# Altium PCB power_12V_5V_3V3_V10.PcbDoc
Units mm, origin at the board's own origin, x right, y up, seen from the top; angles counter-clockwise.
Board outline 32.06 x 54.75 mm, 2 copper layers (Top Layer, Bottom Layer); 22 components, 6 nets, 71 pads, 0 vias.
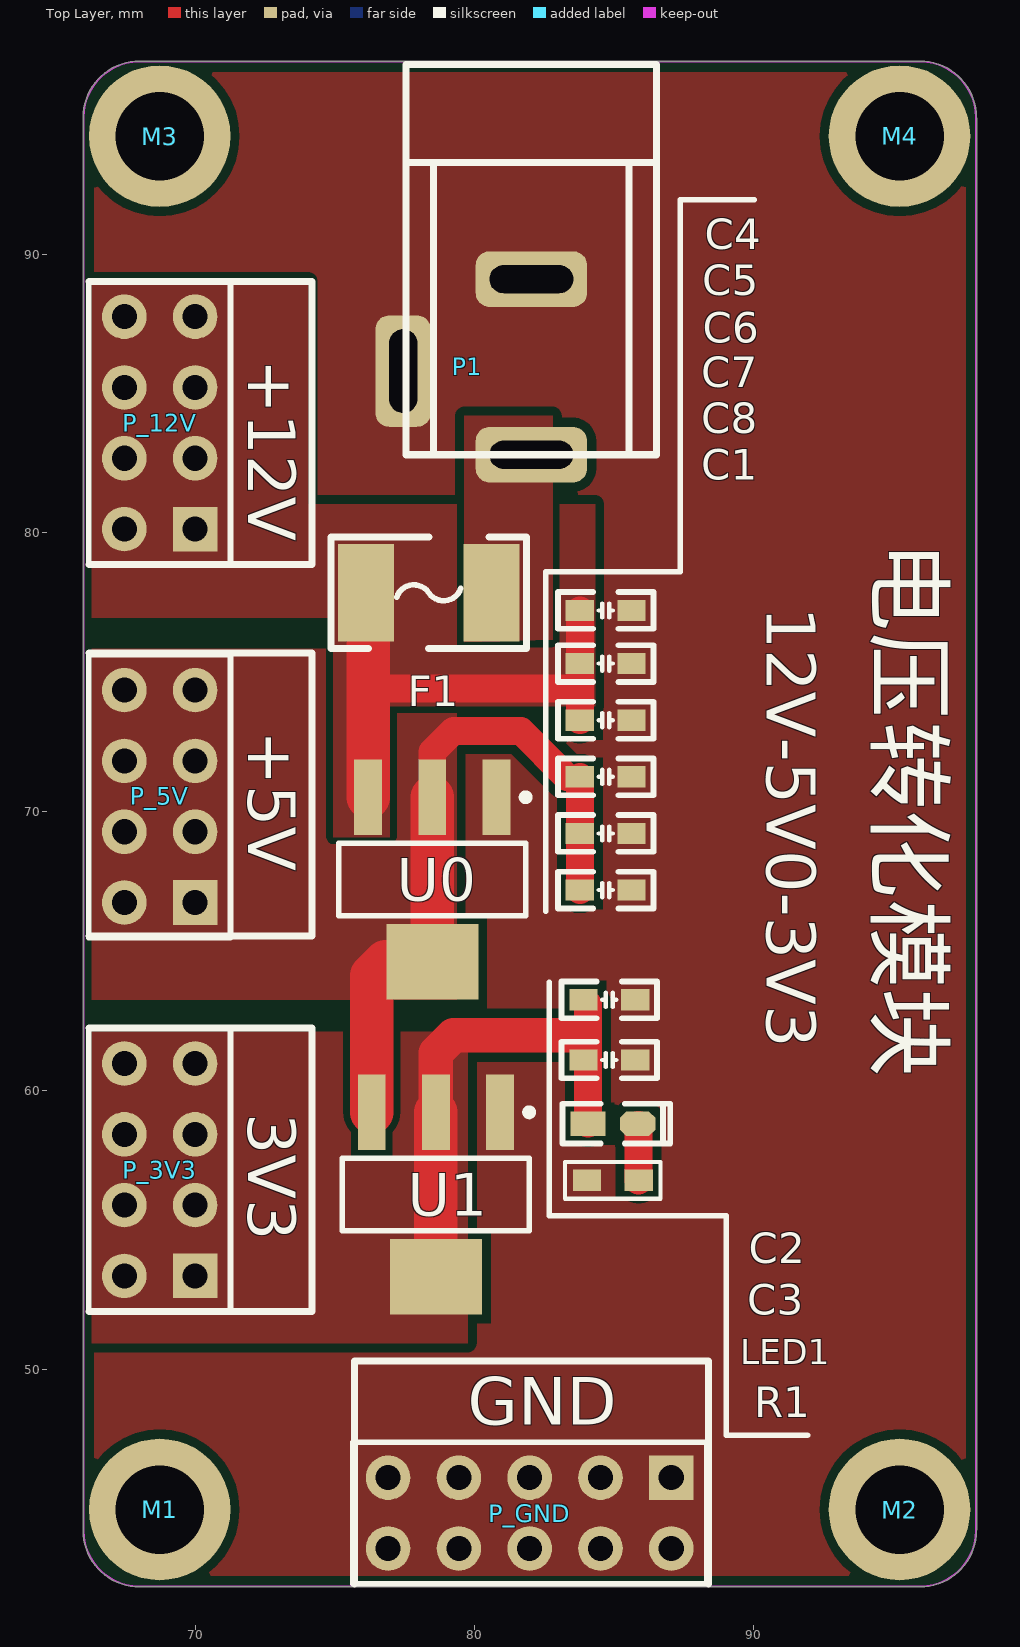
[diagram p0: Top Layer view]
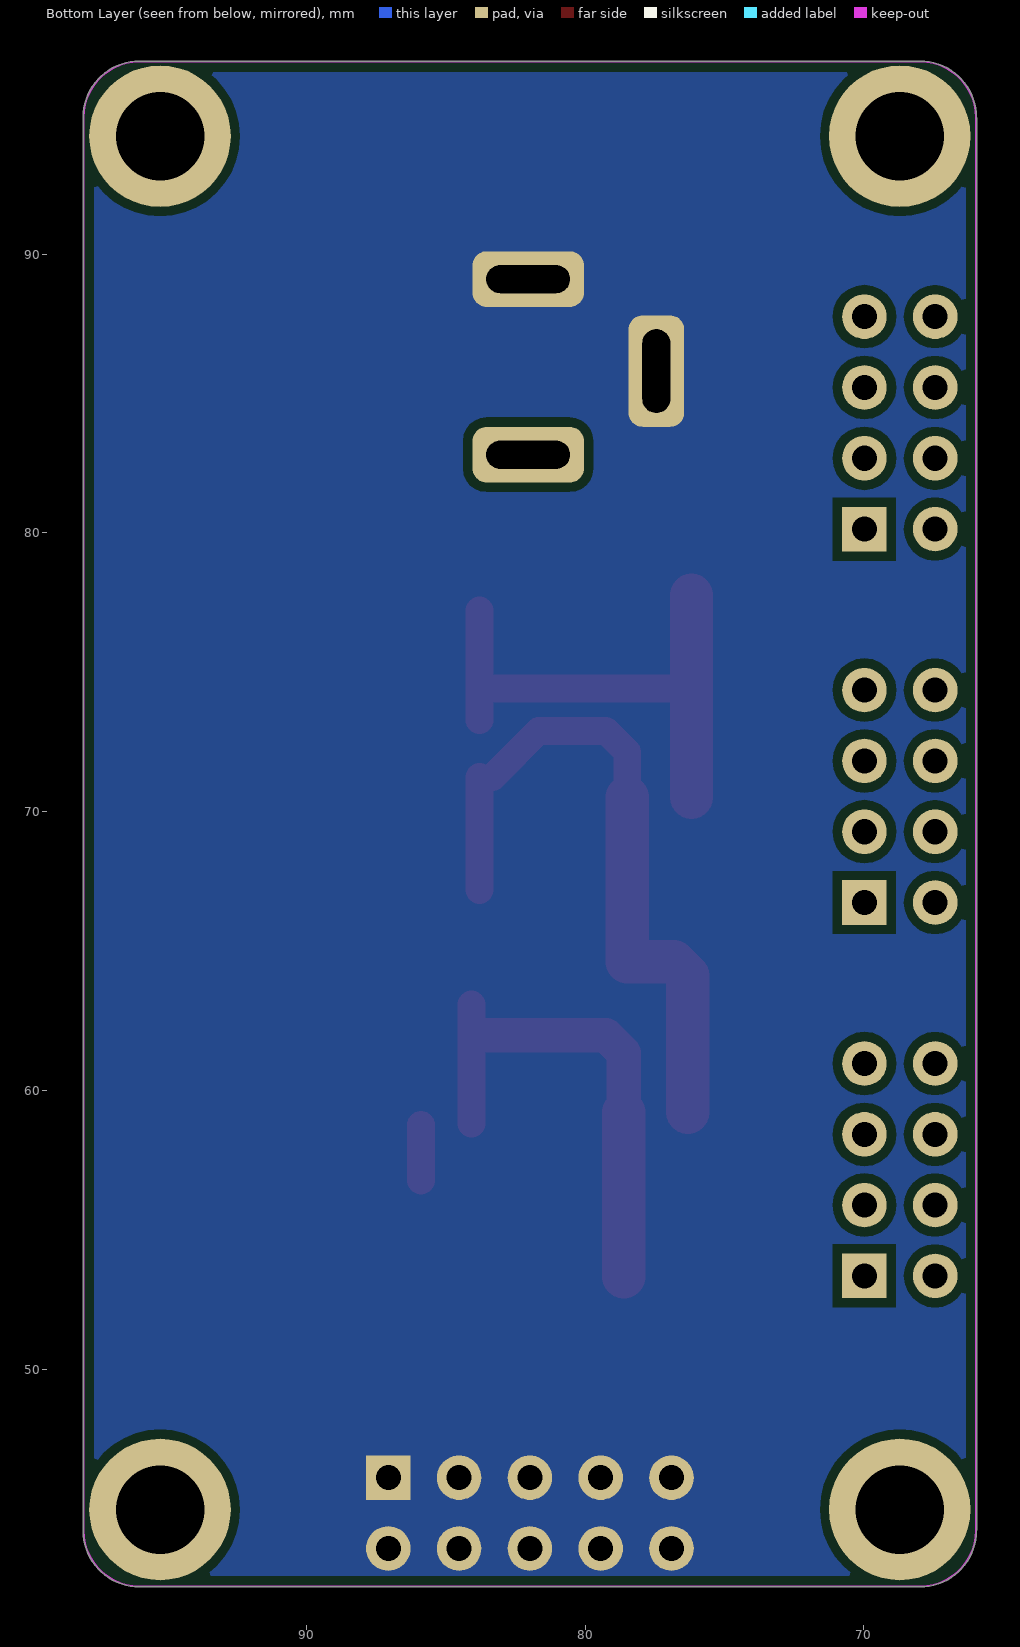
[diagram p1: Bottom Layer view, seen from below]

## Layer stack, top to bottom
Top Solder: solder mask 0.0102, Solder Resist, Dk 3.5
Top Layer: signal copper 0.0356
Dielectric 1: dielectric 0.32, FR-4, Dk 4.8
Bottom Layer: signal copper 0.0356
Bottom Solder: solder mask 0.0102, Solder Resist, Dk 3.5

## Board outline
65.955,44.208 65.955,94.869 cw(c65.984,94.869) 65.96,94.885 cw(c65.984,94.901) 65.955,94.901 cw(c67.984,94.901) 67.984,96.929 cw(c67.984,96.901) 67.984,96.929 95.984,96.929 cw(c95.984,94.901) 98.012,94.901 98.012,44.208 cw(c95.984,44.208) 95.984,42.18 67.984,42.18 cw(c67.984,44.208)

## Design rules (kind name [scope] priority, off if disabled: settings)
Clearance Clearance_2 [InNamedPolygon('GND_L02_P026')] p1: gap=0.33
Clearance Clearance_1 [InNamedPolygon('GND_L01_P025')] p2: gap=0.33
Clearance [All] p3: gap=0.254
PolygonConnect [All] p1: connectstyle=Direct reliefconductorwidth=0.254 reliefentries=4 polygonreliefangle="90 Angle" airgapwidth=0.254
RoutingVias [All] p1: holewidth=0.711 width=1.27 viastyle="Through Hole" minholewidth=0.711 minwidth=1.27 maxholewidth=0.711 maxwidth=1.27
SolderMaskExpansion [All] p1: expansion=0.102
Width [All] p1: maxlimit=10 minlimit=0.254 preferedwidth=0.254
30 further rules are at their usual default settings.

## Components (designator, comment, footprint, x,y, rotation, side; value= is the part's Value field where it differs from the comment)
C1 "Cap" "C 0603_M" 84.709,67.183 r180 top
C2 "Cap" "C 0603_M" 84.836,63.246 r180 top
C3 "Cap" "C 0603_M" 84.836,61.087 r180 top
C4 "Cap" "C 0603_M" 84.709,77.216 r180 top
C5 "Cap" "C 0603_M" 84.709,75.311 r180 top
C6 "Cap" "C 0603_M" 84.709,73.279 r180 top
C7 "Cap" "C 0603_M" 84.709,71.247 r180 top
C8 "Cap" "C 0603_M" 84.709,69.215 r180 top
F1 "Fuse 2" "FU 1812" 78.359,77.851 r180 top
LED1 "5V" "LED 0603Y" 84.963,58.801 r0 top
M1 "M3X10" M3X10_L 68.707,44.958 r0 top locked
M2 "M3X10" M3X10_L 95.25,44.958 r0 top locked
M3 "M3X10" M3X10_L 68.707,94.234 r0 top locked
M4 "M3X10" M3X10_L 95.25,94.234 r0 top locked
P1 "DC_12V" DC-5MM 82.931,82.804 r90 top locked
P_3V3 "Header 4X2" HDR2.54-LI-2x4P 68.707,57.15 r90 top locked
P_5V "Header 4X2" HDR2.54-LI-2x4P 68.707,70.548 r90 top
P_12V "Header 4X2" HDR2.54-LI-2x4P 68.707,83.947 r90 top
P_GND "Header 5X2" HDR2.54-LI-2x5P 81.98,44.831 r180 top locked
R1 "1K" "R 0603-HP_M" 84.963,56.769 r0 top
U0 "AMS1117-5V" SOT223_M 78.486,67.564 r270 top
U1 "AMS1117-3V3" SOT223_M 78.613,56.261 r270 top

## Footprints (in the part's own frame and the unit in brackets; to place one, negate y for a bottom-side part, rotate by r counter-clockwise, add the part's x,y. Pads: shape width x height; smd on the part's side, far side on the other; paste and mask are expansions set on the pad)
"C 0603_M" [mil] "无极性贴片电容"
  rect 40x30 smd: 1(-36.5,0) 2(36.5,0)
  silkscreen extent -68,-26 68,26, body extent -31,-16 31,16, height 32
DC-5MM [mm]
  rrect50% 2x4 hole 1 slot 3 at 90 deg: 1(6.3,0.889) 2(0,0.889)
  rrect50% 4x2 hole 1 slot 3 at 0 deg: 3(3,5.489)
  silkscreen extent 0,-3.61 14,5.38, body extent -0.04,-3.61 13.78,5.89, height 11.02
"FU 1812" [mm] "贴片保险丝"
  rect 2x3.5 smd: 1(-2.25,0) 2(2.25,0)
  silkscreen extent -3.5,-2 3.5,2, body extent -2.3,-1.61 2.3,1.61, height 0.87
HDR2.54-LI-2x4P [mm] "双排排针，4x2脚"
  rect 1.6x1.6 hole 0.9: 1(-3.81,-1.27)
  round 1.6 hole 0.9: 2(-3.81,1.27) 3(-1.27,-1.27) 4(-1.27,1.27) 5(1.27,-1.27) 6(1.27,1.27) 7(3.81,-1.27) 8(3.81,1.27)
  silkscreen extent -5.08,-2.54 5.08,2.54, body extent -5.08,-2.54 5.08,2.54, height 8.5
HDR2.54-LI-2x5P [mm] "双排排针，5x2脚"
  rect 1.6x1.6 hole 0.9: 1(-5.08,-1.27)
  round 1.6 hole 0.9: 2(-5.08,1.27) 3(-2.54,-1.27) 4(-2.54,1.27) 5(0,-1.27) 6(0,1.27) 7(2.54,-1.27) 8(2.54,1.27) 9(5.08,-1.27) 10(5.08,1.27)
  silkscreen extent -6.35,-2.54 6.35,2.54, body extent -6.35,-2.54 6.35,2.54, height 8.5
"LED 0603Y" [mil] "黄色0603LED"
  rect 50x35 smd: 1(-35,0)
  oct 50x35 smd: 2(35,0)
  silkscreen extent -71,-28 81,28, body extent -32,-16 31,16, height 18
M3X10_L [mm] "M3铜柱，长：10mm"
  round 5.08 hole 3.175: 1(0,0)
  body extent -2.7,-2.35 2.7,2.35, height 10.05
"R 0603-HP_M" [mil] "1/10W高精度贴片电阻"
  rect 40x30 smd: 1(-36.5,0) 2(36.5,0)
  silkscreen extent -68,-26 68,26, body extent -31,-16 32,16, height 16
SOT223_M [mm] "SOT223, 4-Leads, Body 6.5x3.5mm, Pitch 2.3mm, Lead Span 7mm, IPC Low Density"
  rect 2.7x1 smd: 1(-2.95,2.3) 2(-2.95,0) 3(-2.95,-2.3)
  rect 2.7x3.3 smd: 4(2.95,0)
  silkscreen extent -3.07,-3.35 1.3,3.48, body extent -1.85,-3.35 1.85,3.35, height 1.7

## Part data
C1 C2 C3 C4 C5 C6 C7 C8: "Capacitor"
F1: "Fuse"
LED1: library part LED2, "Typical RED, GREEN, YELLOW, AMBER GaAs LED"
P1: library part PIN3
P_3V3 P_5V P_12V: "Header, 4-Pin, Dual row"
P_GND: "Header, 5-Pin, Dual row"
R1: library part Res2, "Resistor"
U0 U1: library part ASM1117-3V3

## Nets (pads, with @x,y where several pads share a name; then routed paths per layer and width w, separated by ;. In a path a pad name is that pad's centre, name@x,y a point inside that pad or via, vN(x,y) a via of type N, cw(c..) or ccw(c..) an arc to the next point about the centre after c; other vN are vias at no path point)
+3V3: C2.2 C3.2 LED1.1 P_3V3.1 P_3V3.2 P_3V3.3 P_3V3.4 P_3V3.5 P_3V3.6 P_3V3.7 P_3V3.8 U1.2 U1.4 | length 17.8
  Top Layer w1: LED1.1 C2.2@84.074,63.081
  Top Layer w1.25: U1.2 78.613,61.341 79.248,61.976 83.82,61.976
  Top Layer w1.55: U1.4 U1.2
+5V: C1.2 C7.2 C8.2 P_5V.1 P_5V.2 P_5V.3 P_5V.4 P_5V.5 P_5V.6 P_5V.7 P_5V.8 U0.2 U0.4 U1.3 | length 24.7
  Top Layer w1: U0.2 78.486,72.136 79.248,72.898 81.661,72.898 C7.2@83.312,71.247 ; C1.2 C8.2 C7.2
  Top Layer w1.55: U1.3 76.313,64.121 76.806,64.614 U0.4 U0.2
GND: C1.1 C2.1 C3.1 C4.1 C5.1 C6.1 C7.1 C8.1 P1.1 P1.3 P_GND.1 P_GND.2 P_GND.3 P_GND.4 P_GND.5 P_GND.6 P_GND.7 P_GND.8 P_GND.9 P_GND.10 R1.1 U0.1 U1.1
NetF1_1: F1.1 P1.2
NetLED1_2: LED1.2 R1.2 | length 2
  Top Layer w1: R1.2 LED1.2@85.89,58.763
POWER_DC: C4.2 C5.2 C6.2 F1.2 P_12V.1 P_12V.2 P_12V.3 P_12V.4 P_12V.5 P_12V.6 P_12V.7 P_12V.8 U0.3 | length 18.8
  Top Layer w1: 76.186,74.422 83.782,74.422 ; C6.2 83.782,74.422 ; C4.2 C5.2 83.782,74.422
  Top Layer w1.55: U0.3 76.186,74.422 F1.2@76.186,77.774
pads on no net: M1.1 M2.1 M3.1 M4.1

## Polygon pours and split planes (outlines as drawn)
GND on Top Layer "GND_L01_P025" (solid, remove dead copper, pour order 25): 65.955,44.208 65.955,94.869 cw(c65.984,94.869) 65.96,94.885 cw(c65.984,94.901) 65.955,94.901 cw(c67.984,94.901) 67.984,96.929 cw(c67.984,96.901) 67.984,96.929 95.984,96.929 cw(c95.984,94.901) 98.012,94.901 98.012,44.208 cw(c95.984,44.208) 95.984,42.18 67.984,42.18 cw(c67.984,44.208)
+3V3 on Top Layer "+3V3_L01_P023" (solid, remove dead copper, pour order 23): 66.167,62.103 79.756,62.103 79.756,50.927 66.167,50.927
+5V on Top Layer "+5V_L01_P021" (solid, remove dead copper, pour order 21): 66.167,75.819 66.195,75.847 79.355,75.847 79.355,63.266 79.375,63.246 66.167,63.246
POWER_DC on Top Layer "POWER_DC_L01_P019" (solid, remove dead copper, pour order 19): 74.93,73.787 74.93,69.088 76.962,69.088 76.962,73.787
POWER_DC on Top Layer "POWER_DC_L01_P017" (solid, remove dead copper, pour order 17): 66.167,89.154 66.294,89.027 74.041,89.027 74.041,81.026 84.328,81.026 84.328,73.787 74.93,73.787 74.93,76.835 74.803,76.962 66.04,76.962
NetF1_1 on Top Layer "NETF1_1_L01_P015" (solid, remove dead copper, pour order 15): 79.629,84.201 79.629,76.073 82.804,76.162 82.804,84.201
GND on Bottom Layer "GND_L02_P026" (solid, remove dead copper, pour order 26): 65.955,44.208 65.955,94.869 cw(c65.984,94.869) 65.96,94.885 cw(c65.984,94.901) 65.955,94.901 cw(c67.984,94.901) 67.984,96.929 cw(c67.984,96.901) 67.984,96.929 95.984,96.929 cw(c95.984,94.901) 98.012,94.901 98.012,44.208 cw(c95.984,44.208) 95.984,42.18 67.984,42.18 cw(c67.984,44.208)

## Keep-outs
Keep-Out Layer:
  lines w0.056: 65.984,94.869 65.984,44.208 ccw(c67.984,44.208) 67.984,42.208 95.984,42.208 ccw(c95.984,44.208) 97.984,44.208 97.984,94.901 ccw(c95.984,94.901) 95.984,96.901 67.984,96.901 ccw(c67.984,94.901) 65.984,94.901

## Silkscreen, mask and mechanical layers (free items; w line width, h text height)
Top Overlay:
  lines w0.2: 82.55,66.421 82.55,78.613 87.376,78.613 87.376,91.948 90.043,91.948 ; 82.677,63.881 82.677,55.499 89.027,55.499 89.027,47.625 91.948,47.625
  lines w0.254: 66.167,52.07 74.168,52.07 74.168,62.23 66.167,62.23 ; 66.167,65.532 74.168,65.532 74.168,75.692 66.167,75.692 ; 66.167,78.867 74.168,78.867 74.168,89.027 66.167,89.027 ; 75.692,42.291 75.692,50.292 88.392,50.292 88.392,42.291
  text "+12V" at 71.882,86.233 h1.7 r270
  text "电压转化模块" at 93.726,79.629 h4 r270
  text "12V-5V0-3V3" at 89.916,77.343 h3 r270
  text "+5V" at 71.882,72.898 h1.7 r270
  text "3V3" at 71.882,59.182 h1.7 r270
  text "GND" at 79.756,48.006 h1.7